# Altium PCB bq24259_BatteryCharger.PcbDoc
Units mm, origin at the board's own origin, x right, y up, seen from the top; angles counter-clockwise.
Board outline 32.5 x 20.85 mm, 2 copper layers (Top Layer, Bottom Layer), stack 1.591 mm thick; 24 components, 13 nets, 74 pads, 22 vias.
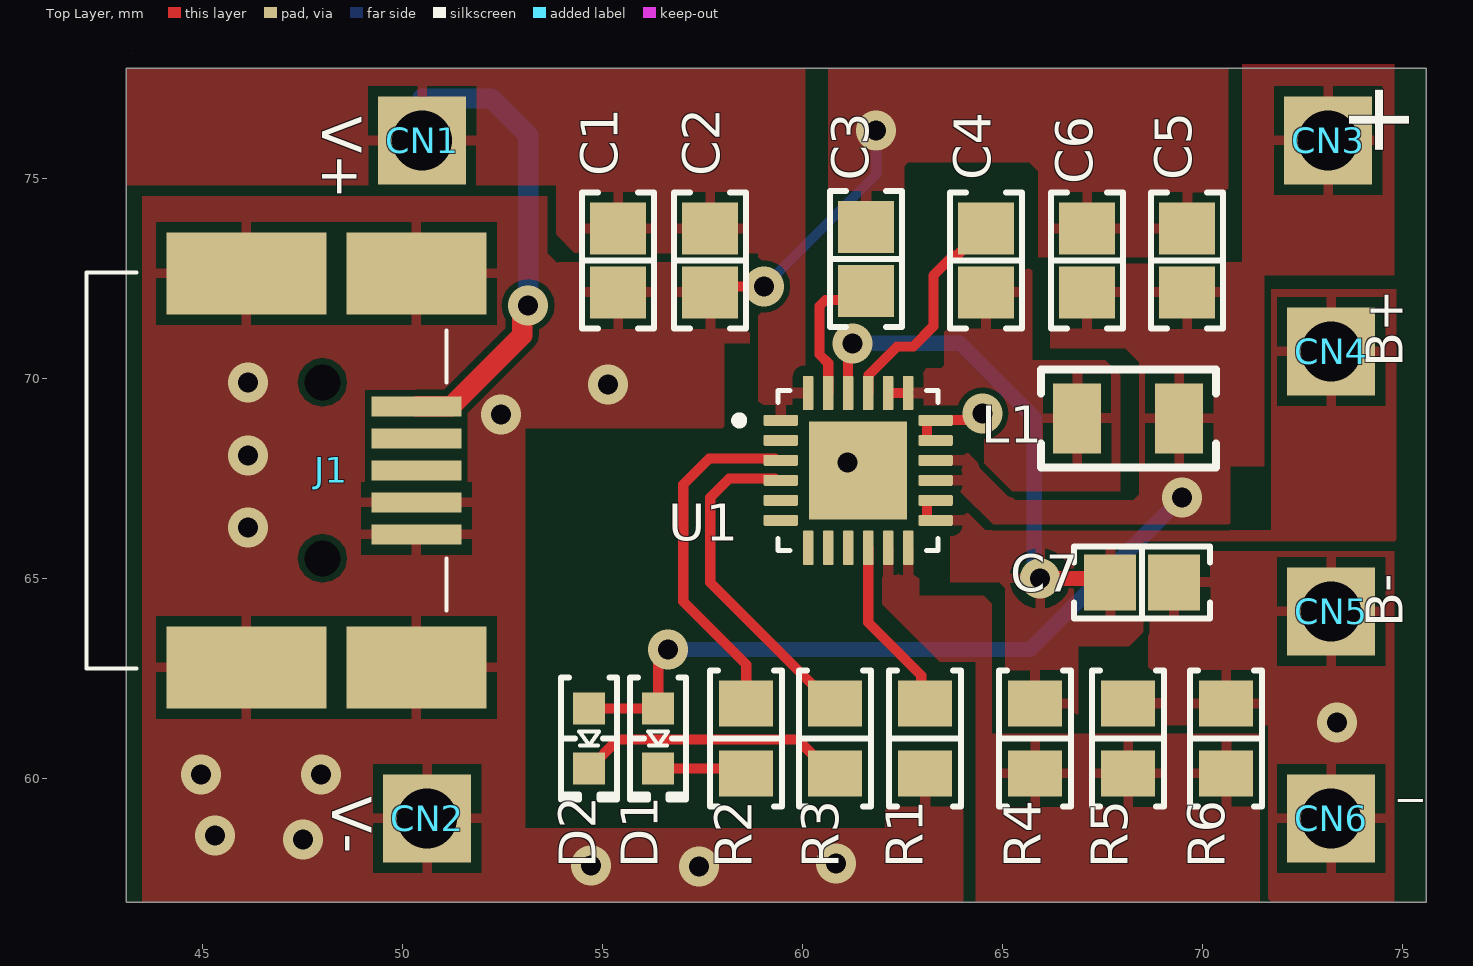
[diagram p0: Top Layer view]
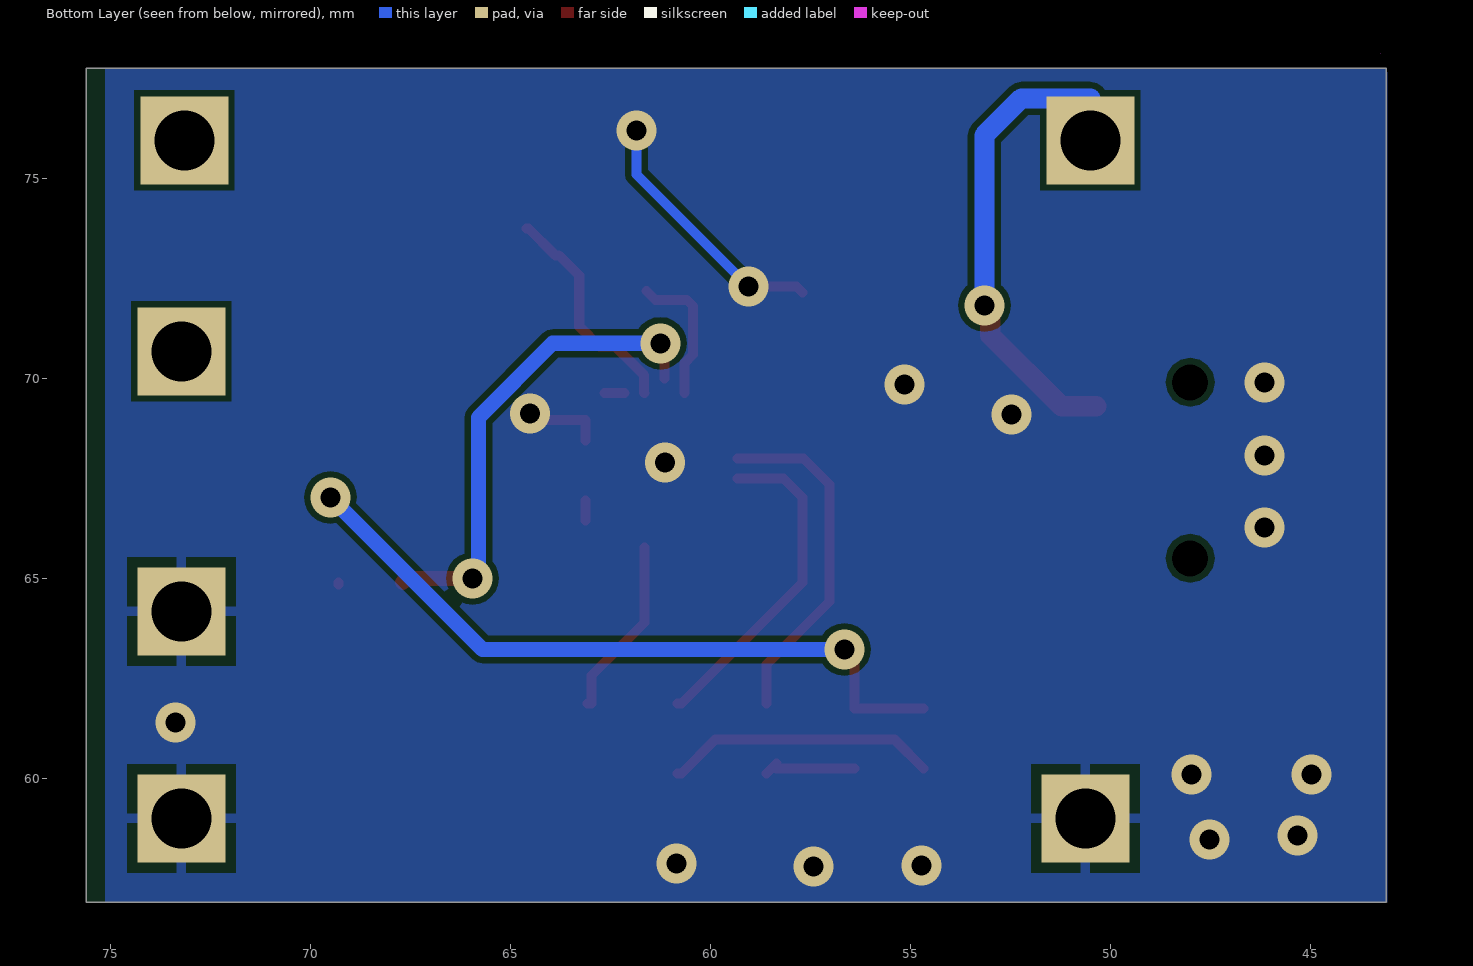
[diagram p1: Bottom Layer view, seen from below]
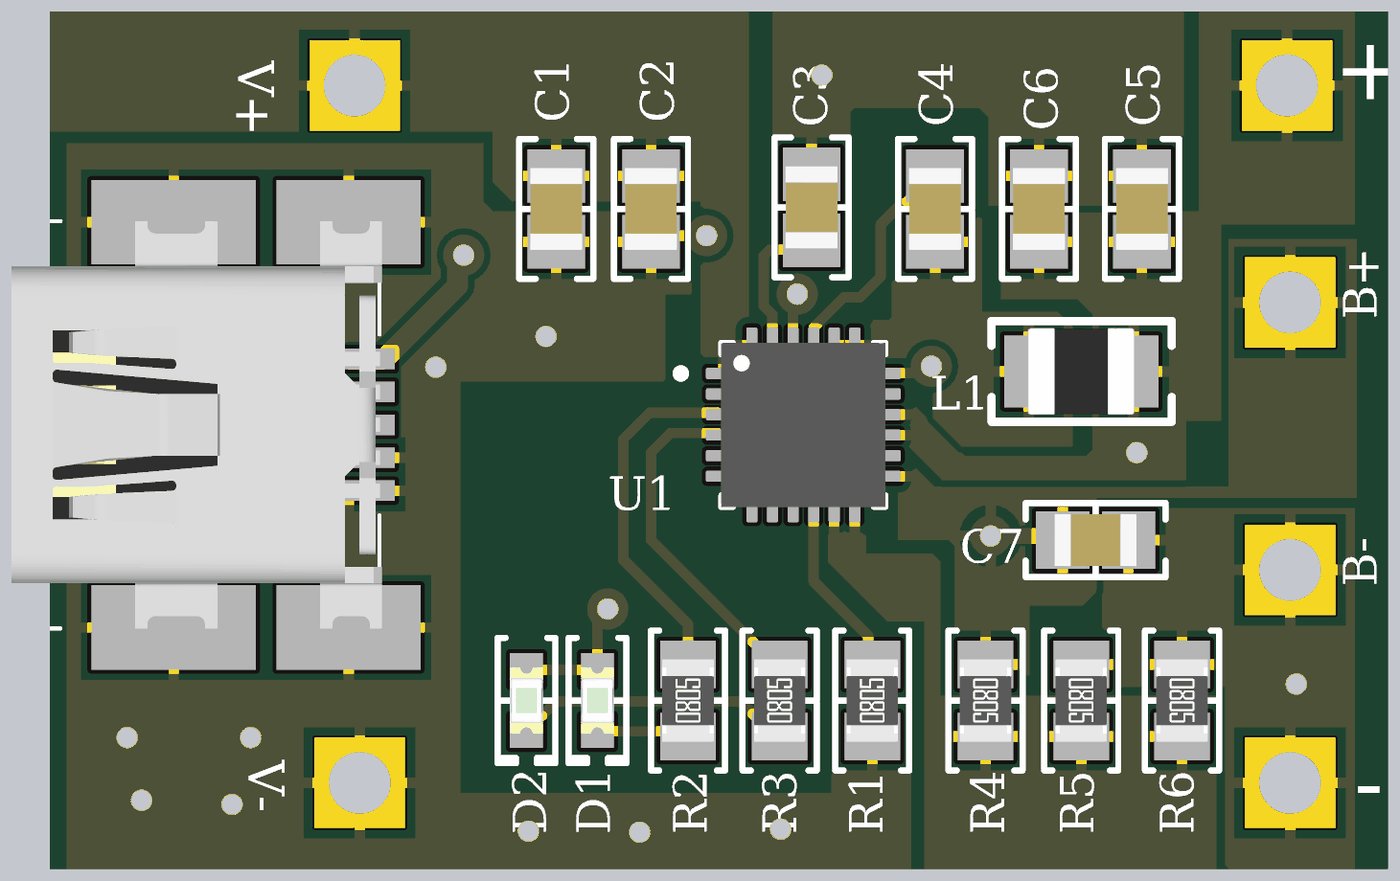
[diagram p2: 3D render of the assembled board from above, using the file's embedded part models]

## Layer stack, top to bottom
Top Solder: solder mask 0.0102, Solder Resist, Dk 3.5
Top Layer: signal copper 0.0356
Dielectric 1: dielectric 1.52, FR-4, Dk 4.8
Bottom Layer: signal copper 0.0356
Bottom Solder: solder mask 0.0102, Solder Resist, Dk 3.5

## Board outline
43.1,56.9 75.6,56.9 75.6,77.75 43.1,77.75
cut-out: 43.25,78.125
cut-out: 43.25,78.125

## Design rules (kind name [scope] priority, off if disabled: settings)
Clearance [All] p1: gap=0.15 ignorepadtopadclearanceinfootprint=FALSE
MinimumSolderMaskSliver [All] p1: minsoldermaskwidth=0
PolygonConnect [All] p1: connectstyle=Relief reliefconductorwidth=0.254 reliefentries=4 polygonreliefangle="90 Angle" airgapwidth=0.254
RoutingVias [All] p1: holewidth=0.6 width=1 viastyle="Through Hole" minholewidth=0.2 minwidth=0.45 maxholewidth=1 maxwidth=1.5
SilkToSilkClearance [All] p1: silktosilkclearance=0
SilkToSolderMaskClearance [IsPad] p1: minsilkscreentomaskgap=0 clearancetoexposedcopper=TRUE
SolderMaskExpansion [All] p1: expansion=0.102
Width [All] p1: maxlimit=2 minlimit=0.15 preferedwidth=0.3 minimp=50.000000 maximp=50.000000 favimp=50.000000
27 further rules are at their usual default settings.

## Components (designator, comment, footprint, x,y, rotation, side; value= is the part's Value field where it differs from the comment)
C1 "1µF" "CAP 0805_2012" 55.4,72.95 r90 top
C2 "0.1µF" "CAP 0805_2012" 57.7,72.95 r90 top
C3 "10µF" "CAP 0805_2012" 61.6,72.987 r270 top
C4 "0.47µF" "CAP 0805_2012" 64.6,72.95 r270 top
C5 "10µF" "CAP 0805_2012" 69.625,72.95 r270 top
C6 "10µF" "CAP 0805_2012" 67.125,72.95 r270 top
C7 "10µF" "CAP 0805_2012" 68.5,64.9 r180 top
CN1 "Power_pad_2x2" POWER_PAD_2X2 50.5,75.95 r0 top
CN2 "Power_pad_2x2" POWER_PAD_2X2 50.625,59 r0 top
CN3 "Power_pad_2x2" POWER_PAD_2X2 73.15,75.95 r0 top
CN4 "Power_pad_2x2" POWER_PAD_2X2 73.225,70.675 r0 top
CN5 "Power_pad_2x2" POWER_PAD_2X2 73.225,64.175 r0 top
CN6 "Power_pad_2x2" POWER_PAD_2X2 73.225,59 r0 top
D1 "Green" "LED 0603_1608 GREEN" 56.4,61 r270 top
D2 "Green" "LED 0603_1608 GREEN" 54.675,61 r270 top
J1 "0675031020" 0675031020 50.356,67.702 r0 top
L1 "1.5µH" "IND 1008_2520" 68.15,69 r0 top
R1 "324 Ohms" "RES 0805_2012" 63.075,61 r90 top
R2 "2.2 kOhms" "RES 0805_2012" 58.6,61 r90 top
R3 "2.2 kOhms" "RES 0805_2012" 60.825,61 r90 top
R4 "5.6 kOhms" "RES 0805_2012" 65.825,61 r270 top
R5 "33 kOhms" "RES 0805_2012" 68.15,61 r270 top
R6 "10 kOhms" "RES 0805_2012" 70.6,61 r270 top
U1 "BQ24259RGER" QFN50P400X400X100-25N 61.4,67.7 r0 top

## Footprints (in the part's own frame and the unit in brackets; to place one, negate y for a bottom-side part, rotate by r counter-clockwise, add the part's x,y. Pads: shape width x height; smd on the part's side, far side on the other; paste and mask are expansions set on the pad)
0675031020 [mm]
  rect 2.25x0.5 smd: 1(0,1.6) 2(0,0.8) 3(0,0) 4(0,-0.8) 5(0,-1.6)
  rect 3.5x2.05 smd: 6(0,4.925) 8(0,-4.925)
  rect 4x2.05 smd: 7(-4.25,4.925) 9(-4.25,-4.925)
  round 0 hole 0.9 unplated: 10(-2.35,2.2) 11(-2.35,-2.2)
  silkscreen extent -8.25,-4.95 0.75,4.95, body extent -8.19,-4.95 0.81,4.95, height 3.95
"CAP 0805_2012" [mm] "Chip Capacitor, 2-Leads, Body 2.00x1.20mm, IPC Medium Density"
  rect 1.3x1.4 smd: 1(-0.8,0) 2(0.8,0)
  silkscreen extent -1.7,-0.9 1.7,0.9, body extent -1,-0.64 1,0.64, height 1.26
"IND 1008_2520" [mm] "Chip Inductance, 2-leads, Body 2.5x2.1mm, IPC Medium Density"
  rect 1.2x1.75 smd: 1(-1.275,0) 2(1.275,0)
  silkscreen extent -2.18,-1.22 2.2,1.22, body extent -1.3,-1.05 1.3,1.05, height 1
"LED 0603_1608 GREEN" [mm] "Chip Diode, 2-Leads, Body 1.60x0.80mm, IPC Medium Density"
  rect 0.8x0.8 smd: 1(-0.75,0) 2(0.75,0)
  silkscreen extent -1.52,-0.7 1.52,0.7, body extent -0.8,-0.4 0.8,0.4, height 0.53
POWER_PAD_2X2 [mm]
  rect 2.2x2.2 hole 1.5 mask+0.05: 1(0,0)
QFN50P400X400X100-25N [mm]
  rrect25% 0.86x0.27 smd: 1(-1.935,1.25) 2(-1.935,0.75) 3(-1.935,0.25) 4(-1.935,-0.25) 5(-1.935,-0.75) 6(-1.935,-1.25) 13(1.935,-1.25) 14(1.935,-0.75) 15(1.935,-0.25) 16(1.935,0.25) 17(1.935,0.75) 18(1.935,1.25)
  rrect25% 0.27x0.86 smd: 7(-1.25,-1.935) 8(-0.75,-1.935) 9(-0.25,-1.935) 10(0.25,-1.935) 11(0.75,-1.935) 12(1.25,-1.935) 19(1.25,1.935) 20(0.75,1.935) 21(0.25,1.935) 22(-0.25,1.935) 23(-0.75,1.935) 24(-1.25,1.935)
  rect 2.45x2.45 smd paste-2: 25(0,0)
  silkscreen extent -3.07,-2 2,2, body extent -2,-2 2,2, height 1
"RES 0805_2012" [mm] "Chip Resistor, 2-Leads, Body 2.00x1.25mm, IPC Medium Density"
  rect 1.15x1.35 smd: 1(-0.875,0) 2(0.875,0)
  silkscreen extent -1.7,-0.9 1.7,0.9, body extent -1,-0.62 1,0.63, height 0.6

## Part data
C1: library part MM05ZC105KCZ2A, "CAP CER 1UF 10V X7R 0805", Device Package="0805 (2012 Metric)", Manufacturer="AVX Corporation", Operating Temperature="-55°C ~ 125°C", Supplier Part Number 1=478-10611-1-ND, Temperature Coefficient=X7R, Tolerance=±10%, Voltage - Rated=10V, Applications="Medical, Non-Critical", Capacitance=1µF, ComponentLink1Description=Datasheet, ComponentLink1URL=http://datasheets.avx.com/AVX-MM.pdf, ComponentLink2Description="DigiKey Link", ComponentLink2URL=http://digikey.com/product-detail/en/avx-corporation/MM05ZC105KCZ2A/478-10611-1-ND/7344872, LastUpdated="2.09.2020 01:04:42", Lifecycle Status=Active, Minimum Order=1, Mounting Type="Surface Mount, MLCC", Package / Case="0805 (2012 Metric)", Packaging=TapeAndReel, PartId=2439, Part Number=MM05ZC105KCZ2A, Part Status=Active, Price=0.50, Series=MM, Size / Dimension="0.079\" L x 0.049\" W (2.01mm x 1.25mm)", Supplier 1=DigiKey, Thickness (Max)="0.029\" (0.74mm)"
C2: library part CC0805MRX7R9BB104, "CAP CER 0.1UF 50V X7R 0805", Device Package="0805 (2012 Metric)", Manufacturer=Yageo, Operating Temperature="-55°C ~ 125°C", Supplier Part Number 1=311-4351-1-ND, Temperature Coefficient=X7R, Tolerance=±20%, Voltage - Rated=50V, Applications="General Purpose", Capacitance=0.1µF, ComponentLink1Description=Datasheet, ComponentLink1URL=https://www.yageo.com/upload/media/product/productsearch/datasheet/mlcc/UPY-GPHC_X7R_6.3V-to-50V_18.pdf, ComponentLink2Description="DigiKey Link", ComponentLink2URL=http://digikey.com/product-detail/en/yageo/CC0805MRX7R9BB104/311-4351-1-ND/8025440, LastUpdated="2.09.2020 01:04:42", Lifecycle Status=Active, Minimum Order=1, Mounting Type="Surface Mount, MLCC", Package / Case="0805 (2012 Metric)", Packaging=TapeAndReel, PartId=2475, Part Number=CC0805MRX7R9BB104, Part Status=Active, Price=0.02, Series=CC, Size / Dimension="0.079\" L x 0.049\" W (2.00mm x 1.25mm)", Supplier 1=DigiKey, Thickness (Max)="0.037\" (0.95mm)"
C3 C5 C6 C7: library part C0805X106K9RACAUTO, "CAP CER 10UF 6.3V X7R 0805", Device Package="0805 (2012 Metric)", Manufacturer=KEMET, Operating Temperature="-55°C ~ 125°C", Ratings=AEC-Q200, Supplier Part Number 1=399-15698-1-ND, Temperature Coefficient=X7R, Tolerance=±10%, Voltage - Rated=6.3V, Applications="Automotive, Boardflex Sensitive", Capacitance=10µF, ComponentLink1Description=Datasheet, ComponentLink1URL=https://api.kemet.com/component-edge/download/datasheet/C0805X106K9RACAUTO.pdf, ComponentLink2Description="DigiKey Link", ComponentLink2URL=http://digikey.com/product-detail/en/kemet/C0805X106K9RACAUTO/399-15698-1-ND/7427578, Features="Soft Termination", LastUpdated="2.09.2020 01:04:41", Lifecycle Status=Active, Minimum Order=1, Mounting Type="Surface Mount, MLCC", Package / Case="0805 (2012 Metric)", Packaging=TapeAndReel, PartId=2960, Part Number=C0805X106K9RACAUTO, Part Status=Active, Price=0.25, Series="SMD Auto X7R Flex", Size / Dimension="0.079\" L x 0.049\" W (2.00mm x 1.25mm)", Supplier 1=DigiKey, Thickness (Max)="0.057\" (1.45mm)"
C4: library part C0805C474K5RACAUTO, "CAP CER 0.47UF 50V X7R 0805", Device Package="0805 (2012 Metric)", Manufacturer=KEMET, Operating Temperature="-55°C ~ 125°C", Ratings=AEC-Q200, Supplier Part Number 1=399-6976-1-ND, Temperature Coefficient=X7R, Tolerance=±10%, Voltage - Rated=50V, Applications="Automotive, Bypass, Decoupling", Capacitance=0.47µF, ComponentLink1Description=Datasheet, ComponentLink1URL=https://api.kemet.com/component-edge/download/datasheet/C0805C474K5RACAUTO.pdf, ComponentLink2Description="DigiKey Link", ComponentLink2URL=http://digikey.com/product-detail/en/kemet/C0805C474K5RACAUTO/399-6976-1-ND/3314485, LastUpdated="2.09.2020 01:04:41", Lifecycle Status=Active, Minimum Order=1, Mounting Type="Surface Mount, MLCC", Package / Case="0805 (2012 Metric)", Packaging=TapeAndReel, PartId=2727, Part Number=C0805C474K5RACAUTO, Part Status=Active, Price=0.08, Series="SMD Auto X7R", Size / Dimension="0.079\" L x 0.049\" W (2.00mm x 1.25mm)", Supplier 1=DigiKey, Thickness (Max)="0.043\" (1.10mm)"
D1 D2: library part "LG L29K-G2J1-24-Z", "LED GREEN DIFFUSED 0603 SMD", Current - Test=2mA, Device Package="0603 (1608 Metric)", Lens Color=White, Manufacturer="OSRAM Opto Semiconductors Inc.", Millicandela Rating=3.92mcd, Supplier Device Package=0603, Supplier Part Number 1=475-2709-1-ND, Voltage - Forward (Vf) (Typ)=1.7V, Color=Green, ComponentLink1Description=Datasheet, ComponentLink1URL=https://dammedia.osram.info/media/resource/hires/osram-dam-2493945/LG%20L29K.pdf, ComponentLink2Description="DigiKey Link", ComponentLink2URL=http://digikey.com/product-detail/en/osram-opto-semiconductors-inc/LG-L29K-G2J1-24-Z/475-2709-1-ND/1938876, Configuration=Standard, Height (Max)=0.65mm, LastUpdated="2.09.2020 01:20:41", Lens Size="1.30mm x 0.80mm", Lens Style="Rectangle with Flat Top", Lens Transparency=Diffused, Lifecycle Status=Active, Minimum Order=1, Mounting Type="Surface Mount", Package / Case="0603 (1608 Metric)", Packaging=TapeAndReel, PartId=690, Part Number="LG L29K-G2J1-24-Z", Part Status=Active, Price=0.10, Series="SMARTLED® 0603", Size / Dimension="1.70mm L x 0.80mm W", Supplier 1=DigiKey, Viewing Angle=160°, Wavelength - Dominant=570nm, Wavelength - Peak=572nm
J1: "Connector", Manufacturer_Name=Molex, Mouser Part Number=N/A, Arrow Part Number=0675031020, Arrow Price/Stock=https://www.arrow.com/en/products/0675031020/molex, Datasheet Link=http://www.molex.com/webdocs/datasheets/pdf/en-us/0675031020_IO_CONNECTORS.pdf, Manufacturer_Part_Number=0675031020, Mouser Price/Stock=https://www.mouser.co.uk/ProductDetail/Molex/0675031020?qs=PBcRNPEHKsqIYt%2F7ECA4dQ%3D%3D
L1: library part ASMPH-1008-1R5M-T, "FIXED IND 1.5UH 1.5A 70 MOHM SMD", Current - Saturation=1.2A, Current Rating (Amps)=1.5A, DC Resistance (DCR)=70mOhm, Device Package="1008 (2520 Metric)", Frequency - Self Resonant=65MHz, Inductance Frequency - Test=1MHz, Manufacturer="Abracon LLC", Operating Temperature="-40°C ~ 85°C", Supplier Part Number 1=535-12283-1-ND, Tolerance=±20%, ComponentLink1Description=Datasheet, ComponentLink1URL=https://abracon.com/Magnetics/power/ASMPH-1008.pdf, ComponentLink2Description="DigiKey Link", ComponentLink2URL=http://digikey.com/product-detail/en/abracon-llc/ASMPH-1008-1R5M-T/535-12283-1-ND/4214883, Height - Seated (Max)="0.039\" (1.00mm)", Inductance=1.5µH, LastUpdated="2.09.2020 01:29:19", Lifecycle Status=Active, Material - Core=Ferrite, Minimum Order=1, Mounting Type="Surface Mount", Package / Case="1008 (2520 Metric)", Packaging=TapeAndReel, PartId=3465, Part Number=ASMPH-1008-1R5M-T, Part Status=Active, Price=0.13, Series=ASMPH-1008, Shielding=Shielded, Size / Dimension="0.098\" L x 0.079\" W (2.50mm x 2.00mm)", Supplier 1=DigiKey, Supplier Device Package="1008 (2520 Metric)", Type=Multilayer
R1: library part RC0805FR-07324RL, "RES SMD 324 OHM 1% 1/8W 0805", Device Package="0805 (2012 Metric)", Manufacturer=Yageo, Operating Temperature="-55°C ~ 155°C", Power (Watts)="0.125W, 1/8W", Supplier Device Package=0805, Supplier Part Number 1=311-324CRCT-ND, Temperature Coefficient=±100ppm/°C, Tolerance=±1%, ComponentLink1Description=Datasheet, ComponentLink1URL=https://www.yageo.com/upload/media/product/productsearch/datasheet/rchip/PYu-RC_Group_51_RoHS_L_10.pdf, ComponentLink2Description="DigiKey Link", ComponentLink2URL=http://digikey.com/product-detail/en/yageo/RC0805FR-07324RL/311-324CRCT-ND/730807, Composition="Thick Film", Features="Moisture Resistant", Height - Seated (Max)="0.024\" (0.60mm)", LastUpdated="2.09.2020 01:14:58", Lifecycle Status=Active, Minimum Order=1, Number of Terminations=2, Package / Case="0805 (2012 Metric)", Packaging=CutTape, PartId=39528, Part Number=RC0805FR-07324RL, Part Status=Active, Price=0.10, Resistance="324 Ohms", Series=RC, Size / Dimension="0.079\" L x 0.049\" W (2.00mm x 1.25mm)", Supplier 1=DigiKey
R2 R3: library part ERA-6APB222V, "RES 2.2K OHM 0.1% 1/8W 0805", Device Package="0805 (2012 Metric)", Manufacturer="Panasonic Electronic Components", Operating Temperature="-55°C ~ 155°C", Power (Watts)="0.125W, 1/8W", Ratings=AEC-Q200, Supplier Device Package=0805, Supplier Part Number 1=P2.2KAZCT-ND, Temperature Coefficient=±15ppm/°C, Tolerance=±0.1%, ComponentLink1Description=Datasheet, ComponentLink1URL=https://industrial.panasonic.com/cdbs/www-data/pdf/RDM0000/AOA0000C307.pdf, ComponentLink2Description="DigiKey Link", ComponentLink2URL=http://digikey.com/product-detail/en/panasonic-electronic-components/ERA-6APB222V/P2.2KAZCT-ND/3069474, Composition="Thin Film", Features="Automotive AEC-Q200", Height - Seated (Max)="0.024\" (0.60mm)", LastUpdated="2.09.2020 01:15:21", Lifecycle Status=Active, Minimum Order=1, Number of Terminations=2, Package / Case="0805 (2012 Metric)", Packaging=TapeAndReel, PartId=29309, Part Number=ERA-6APB222V, Part Status=Active, Price=0.17, Resistance="2.2 kOhms", Series=ERA-6A, Size / Dimension="0.079\" L x 0.049\" W (2.00mm x 1.25mm)", Supplier 1=DigiKey
R4: library part AT0805BRD075K6L, "RES 5.6K OHM 0.1% 1/8W 0805", Device Package="0805 (2012 Metric)", Manufacturer=Yageo, Operating Temperature="-55°C ~ 155°C", Power (Watts)="0.125W, 1/8W", Ratings=AEC-Q200, Supplier Device Package=0805, Supplier Part Number 1=YAG5126CT-ND, Temperature Coefficient=±25ppm/°C, Tolerance=±0.1%, ComponentLink1Description=Datasheet, ComponentLink1URL=http://www.yageo.com/NewPortal/_en/search/productDocs.jsp?YageoPartNumber=AT0805BRD075K6L, ComponentLink2Description="DigiKey Link", ComponentLink2URL=http://digikey.com/product-detail/en/yageo/AT0805BRD075K6L/YAG5126CT-ND/6643291, Composition="Thin Film", Features="Anti-Sulfur, Automotive AEC-Q200, Moisture Resistant", Height - Seated (Max)="0.024\" (0.60mm)", LastUpdated="2.09.2020 01:15:21", Lifecycle Status=Active, Minimum Order=1, Number of Terminations=2, Package / Case="0805 (2012 Metric)", Packaging=TapeAndReel, PartId=29265, Part Number=AT0805BRD075K6L, Part Status=Active, Price=0.17, Resistance="5.6 kOhms", Series=AT, Size / Dimension="0.079\" L x 0.049\" W (2.00mm x 1.25mm)", Supplier 1=DigiKey
R5: library part ERJ-6ENF3302V, "RES SMD 33K OHM 1% 1/8W 0805", Device Package="0805 (2012 Metric)", Manufacturer="Panasonic Electronic Components", Operating Temperature="-55°C ~ 155°C", Power (Watts)="0.125W, 1/8W", Ratings=AEC-Q200, Supplier Device Package=0805, Supplier Part Number 1=P33.0KCCT-ND, Temperature Coefficient=±100ppm/°C, Tolerance=±1%, ComponentLink1Description=Datasheet, ComponentLink1URL=https://industrial.panasonic.com/cdbs/www-data/pdf/RDA0000/AOA0000C304.pdf, ComponentLink2Description="DigiKey Link", ComponentLink2URL=http://digikey.com/product-detail/en/panasonic-electronic-components/ERJ-6ENF3302V/P33.0KCCT-ND/1746853, Composition="Thick Film", Features="Automotive AEC-Q200", Height - Seated (Max)="0.028\" (0.70mm)", LastUpdated="2.09.2020 01:15:19", Lifecycle Status=Active, Minimum Order=1, Number of Terminations=2, Package / Case="0805 (2012 Metric)", Packaging=TapeAndReel, PartId=30111, Part Number=ERJ-6ENF3302V, Part Status=Active, Price=0.01, Resistance="33 kOhms", Series=ERJ, Size / Dimension="0.079\" L x 0.049\" W (2.00mm x 1.25mm)", Supplier 1=DigiKey
R6: library part CRCW080510K0FKEA, "RES SMD 10K OHM 1% 1/8W 0805", Device Package="0805 (2012 Metric)", Manufacturer="Vishay Dale", Operating Temperature="-55°C ~ 155°C", Power (Watts)="0.125W, 1/8W", Ratings=AEC-Q200, Supplier Device Package=0805, Supplier Part Number 1=541-10.0KCCT-ND, Temperature Coefficient=±100ppm/°C, Tolerance=±1%, ComponentLink1Description=Datasheet, ComponentLink1URL=http://www.vishay.com/docs/20035/dcrcwe3.pdf, ComponentLink2Description="DigiKey Link", ComponentLink2URL=http://digikey.com/product-detail/en/vishay-dale/CRCW080510K0FKEA/541-10.0KCCT-ND/1180897, Composition="Thick Film", Features="Automotive AEC-Q200", Height - Seated (Max)="0.020\" (0.50mm)", LastUpdated="2.09.2020 01:15:23", Lifecycle Status=Active, Minimum Order=1, Number of Terminations=2, Package / Case="0805 (2012 Metric)", Packaging=TapeAndReel, PartId=28101, Part Number=CRCW080510K0FKEA, Part Status=Active, Price=0.01, Resistance="10 kOhms", Series=CRCW, Size / Dimension="0.079\" L x 0.049\" W (2.00mm x 1.25mm)", Supplier 1=DigiKey
U1: "IC BATTERY CHARGER 2A LION 24QFN", Battery Pack Voltage=4.2V, Case/Package=VQFN, Manufacturer="Texas Instruments", Max Charge Current=2A, Max Operating Temperature=85°C, Max Supply Voltage=6.2V, Min Operating Temperature=-40°C, Supplier Part Number 1=595-BQ24259RGER, Category="Battery Management", ComponentLink1Description=http://www.ti.com/lit/ds/symlink/bq24259.pdf?src-supplier=Digi-Key, ComponentLink1URL=http://www.ti.com/lit/ds/symlink/bq24259.pdf?src-supplier=Digi-Key, ComponentLink2Description=http://www.ti.com/lit/gpn/bq24259?src-supplier=Mouser, ComponentLink2URL=http://www.ti.com/lit/gpn/bq24259?src-supplier=Mouser, Fault Protection="Over Current,Over Voltage,Over Temperature", Interface=I2C,USB, Lead Free="Lead Free", Manufacturer 2="Texas Instruments", Manufacturer Part Number=BQ24259RGER, Manufacturer Part Number 2=BQ24259RGER, Number of Cells=1, Packaging="Tape and Reel", Pricing 2="1=2,31000, 10=2,07600, 25=1,95840, 100=1,66850, 250=1,56668, 500=1,37084, 1000=1,29325 (USD)", RoHS=Yes, RoHS Compliant=Yes, Supplier 1=Mouser, Supplier 2=Digi-Key, Supplier Part Number 2=296-43322-1-ND

## Via types
v1: diameter 1, hole 0.5, Top Layer to Bottom Layer, tented both sides, 22 vias

## Nets (pads, with @x,y where several pads share a name; then routed paths per layer and width w, separated by ;. In a path a pad name is that pad's centre, name@x,y a point inside that pad or via, vN(x,y) a via of type N, cw(c..) or ccw(c..) an arc to the next point about the centre after c; other vN are vias at no path point)
+Vin: C1.2 C2.2 CN1.1 J1.1 U1.1 U1.24 | length 11.5
  Top Layer w0.508: J1.1 51.223,69.302 53.004,71.083 53.004,71.679 v1(53.15,71.825)
  Bottom Layer w0.508: CN1.1@50.5,77 52.225,77 53.15,76.075 v1(53.15,71.825)
GND: C1.1 C2.1 C3.1 C5.1 C6.1 C7.1 CN2.1 CN5.1 CN6.1 J1.4 J1.5 J1.6 J1.7 J1.8 J1.9 R1.1 R5.1 R6.1 U1.17 U1.18 U1.25 | length 9.2
  Top Layer w0.254: C2.1 57.85,72.3 v1(59.05,72.3) ; U1.17@63.12,68.45 63.12,68.95 63.128,68.958 64.343,68.958 v1(64.51,69.125) ; C7.1@69.3,64.85 C7.1 ; v1@73.181,61.594 v1(73.375,61.4) ; CN6.1@73.225,58.25 CN6.1@73.375,58.4 ; CN5.1 CN5.1@73.375,64.025
  Bottom Layer w0.254: v1(59.05,72.3) 61.85,75.1 v1(61.85,76.2)
  other v1: 57.425,57.8 54.725,57.825 60.848,57.873 47.525,58.475 45.325,58.575 44.975,60.1 47.975,60.1 46.15,66.275 61.135,67.9 46.15,68.075 52.475,69.1 55.15,69.85 46.15,69.9
NetC3_2: C3.2 U1.23 | length 3.6
  Top Layer w0.254: U1.23 60.65,70.383 60.435,70.598 60.435,71.81 60.584,71.959 61.371,71.959 C3.2
NetC4_1: C4.1 U1.21 | length 5.7
  Top Layer w0.254: U1.21 61.658,69.643 61.658,70.08 62.378,70.8 62.776,70.8 63.281,71.305 63.281,72.572 63.785,73.077 63.877,73.077 64.55,73.75 C4.1
NetC4_2: C4.2 L1.1 U1.19 U1.20 | length 0.5
  Top Layer w0.254: U1.20 U1.19
NetC7_2: C7.2 CN4.1 R4.1 U1.13 U1.14 U1.22 | length 12.6
  Top Layer w0.254: U1.22@61.149,69.996 61.149,70.775 v1(61.253,70.878) ; U1.13@63.12,66.45 U1.14@63.12,66.95
  Top Layer w0.381: v1(65.95,65) 67.6,65 C7.2
  Bottom Layer w0.381: v1(61.253,70.878) 63.945,70.878 65.8,69.024 65.8,65.15 v1(65.95,65)
NetD1_2: D1.2 R2.1 | length 2.3
  Top Layer w0.254: D1.2 R2.1@58.35,60.25 ; R2.1@58.35,60.375 R2.1
NetD2_2: D2.2 R3.1 | length 6.8
  Top Layer w0.254: D2.2 55.402,60.977 59.873,60.977 60.725,60.125 R3.1
NetR1_2: R1.2 U1.10 | length 4.5
  Top Layer w0.254: U1.10 61.65,63.9 62.975,62.575 62.975,61.875 R1.2
NetR2_2: R2.2 U1.3 | length 8.7
  Top Layer w0.254: R2.2 58.6,62.85 57.025,64.425 57.025,67.35 57.675,68 U1.3@59.315,68
NetR3_2: R3.2 U1.4 | length 8.3
  Top Layer w0.254: U1.4@59.315,67.5 58.175,67.5 57.7,67.025 57.7,64.9 60.725,61.875 R3.2
NetR4_2: R4.2 R5.2 R6.2 U1.11 U1.12
SYS: C5.2 C6.2 CN3.1 D1.1 D2.1 L1.2 U1.15 U1.16 | length 17.8
  Top Layer w0.254: D2.1 D1.1 56.4,63.076 56.549,63.225 v1(56.65,63.225)
  Bottom Layer w0.381: v1(56.65,63.225) 65.7,63.225 v1(69.5,67.025)
pads on no net: J1.2 J1.3 J1.10 J1.11 U1.2 U1.5 U1.6 U1.7 U1.8 U1.9

## Polygon pours and split planes (outlines as drawn)
NetC4_2 on Top Layer "NETC4_2_L01_P036" (solid, pour order 36): 63.55,72.975 65.475,72.975 65.75,72.7 65.75,70.45 67.575,70.45 67.95,70.075 67.95,67.175 65.25,67.175 64.55,67.875 64.55,69.325 62.185,69.325 62.185,70.25 63.475,70.25 63.55,70.325
SYS on Top Layer "SYS_L01_P052" (solid, pour order 52): 62.561,67.275 63.85,67.275 64.775,66.35 70.7,66.35 70.7,67.8 71.55,67.8 71.55,72.575 74.8,72.575 74.8,77.85 71,77.85 71,72.9 66.475,72.9 66.2,72.625 66.2,70.75 68.075,70.75 68.425,70.4 68.425,67.1 68.275,66.95 65.325,66.95 64.1,68.175 63.95,68.225 62.588,68.225
GND on Top Layer "GND_L01_P024" (solid, pour order 24): 64.025,56.9 64.025,60.8 62.075,60.8 62.075,58.75 62.15,58.75 59.95,58.75 53.075,58.75 53.075,68.75 58,68.75 58.05,68.8 58.05,70.875 58.686,70.875 58.715,72.9 53.9,72.9 53.875,72.875 53.625,73.125 53.625,74.55 43.5,74.55 43.5,56.9
GND on Top Layer "GND_L01_P060" (solid, pour order 60): 68.65,65.675 74.8,65.675 74.8,56.9 71.65,56.9 71.65,61.325 67.4,61.325 67.4,62.675 67.35,62.725 67.4,62.775 68.65,62.775
NetC7_2 on Top Layer "NETC7_2_L01_P058" (solid, pour order 58): 62.725,67.025 62.75,67 62.75,66.425 63.375,66.425 63.7,66.1 63.7,64.9 64.925,64.9 65.075,64.75 65.075,61.4 66.8,61.4 66.9,61.5 66.9,63.3 68.175,63.3 68.525,63.65 68.525,65.925 74.9,65.925 74.85,65.975 74.85,72.225 71.725,72.225 71.725,66.2 64.575,66.2 63.725,67.05 63.725,67.125 62.75,67.125 62.725,67.1
NetR4_2 on Top Layer "NETR4_2_L01_P056" (solid, pour order 56): 62.613,66.245 62.925,65.933 62.925,64.57 64.538,64.57 64.738,64.37 64.738,61.12 71.438,61.12 71.438,56.895 64.338,56.895 64.338,62.92 63.438,62.92 62,64.357 62,66.245
+Vin on Top Layer "+VIN_L01_P020" (solid, pour order 20): 43.1,74.825 53.85,74.825 53.85,73.6 54.325,73.125 58.9,73.125 58.9,68.775 59.85,68.775 59.85,69.1 59.9,69.15 60.075,69.15 60.075,77.75 43.1,77.75
GND on Top Layer "GND_L01_P042" (solid, pour order 42): 60.65,73.025 60.65,77.75 70.65,77.75 70.65,73.2 70.45,73 70.425,73.025 65.9,73.025 65.9,75.175 65.675,75.4 62.65,75.4 62.55,75.3 62.55,72.95
no net on Top Layer "NONET_L-01_P-001" (solid, pour order 46): 72.875,74.975
no net on Top Layer "NONET_L-01_P-001" (solid, pour order 30): 63.55,72.975
GND on Bottom Layer "GND_L02_P000" (solid, pour order 0): 43.075,78.675 43.075,56.9 75.125,56.9 75.125,77.75 43.1,77.75 43.1,78.825

## Silkscreen, mask and mechanical layers (free items; w line width, h text height)
Top Overlay:
  text "V+" at 47.675,76.55 h1.7 r270
  text "+" at 75.75,75.45 h3 r90
  text "B+" at 75.325,70.275 h1.6 r90
  text "B-" at 75.325,63.775 h1.6 r90
  text "V-" at 47.925,59.55 h1.7 r270
  text "-" at 74.775,58.275 h3
Mechanical 1:
  lines w0.1: 43.05,56.9 ccw(c43.1,56.9) 43.1,56.85 ; 43.05,56.9 ccw(c43.1,56.9) 43.1,56.85 ; 43.05,56.9 ccw(c43.1,56.9) 43.1,56.85 ; 43.05,56.9 ccw(c43.1,56.9) 43.1,56.85 ; 43.05,56.9 43.05,77.75 ; 43.05,56.9 43.05,77.75 ; 43.05,77.75 cw(c43.1,77.75) 43.1,77.8 ; 43.05,77.75 cw(c43.1,77.75) 43.1,77.8 ; 43.05,77.75 cw(c43.1,77.75) 43.1,77.8 ; 43.05,77.75 cw(c43.1,77.75) 43.1,77.8 ; 43.1,56.85 75.6,56.85 ; 43.1,56.85 75.6,56.85 ; 43.1,77.8 75.6,77.8 ; 43.1,77.8 75.6,77.8 ; 75.6,56.85 ccw(c75.6,56.9) 75.65,56.9 ; 75.6,56.85 ccw(c75.6,56.9) 75.65,56.9 ; 75.6,56.85 ccw(c75.6,56.9) 75.65,56.9 ; 75.6,56.85 ccw(c75.6,56.9) 75.65,56.9 ; 75.6,77.8 cw(c75.6,77.75) 75.65,77.75 ; 75.6,77.8 cw(c75.6,77.75) 75.65,77.75 ; 75.6,77.8 cw(c75.6,77.75) 75.65,77.75 ; 75.6,77.8 cw(c75.6,77.75) 75.65,77.75 ; 75.65,56.9 75.65,77.75 ; 75.65,56.9 75.65,77.75
Mechanical 15:
  lines w2: 42.1,56.9 ccw(c43.1,56.9) 43.1,55.9 ; 42.1,56.9 ccw(c43.1,56.9) 43.1,55.9 ; 42.1,56.9 42.1,77.75 ; 42.1,77.75 cw(c43.1,77.75) 43.1,78.75 ; 42.1,77.75 cw(c43.1,77.75) 43.1,78.75 ; 43.1,55.9 75.6,55.9 ; 43.1,78.75 75.6,78.75 ; 75.6,55.9 ccw(c75.6,56.9) 76.6,56.9 ; 75.6,55.9 ccw(c75.6,56.9) 76.6,56.9 ; 75.6,78.75 cw(c75.6,77.75) 76.6,77.75 ; 75.6,78.75 cw(c75.6,77.75) 76.6,77.75 ; 76.6,56.9 76.6,77.75